# Altium PCB LO.PcbDoc
Units mm, origin at the board's own origin, x right, y up, seen from the top; angles counter-clockwise.
Board outline 35.98 x 47.66 mm, 4 copper layers (Top Layer, Internal Plane 1, Internal Plane 2, Bottom Layer), stack 0.758 mm thick; 148 components, 120 nets, 525 pads, 474 vias.
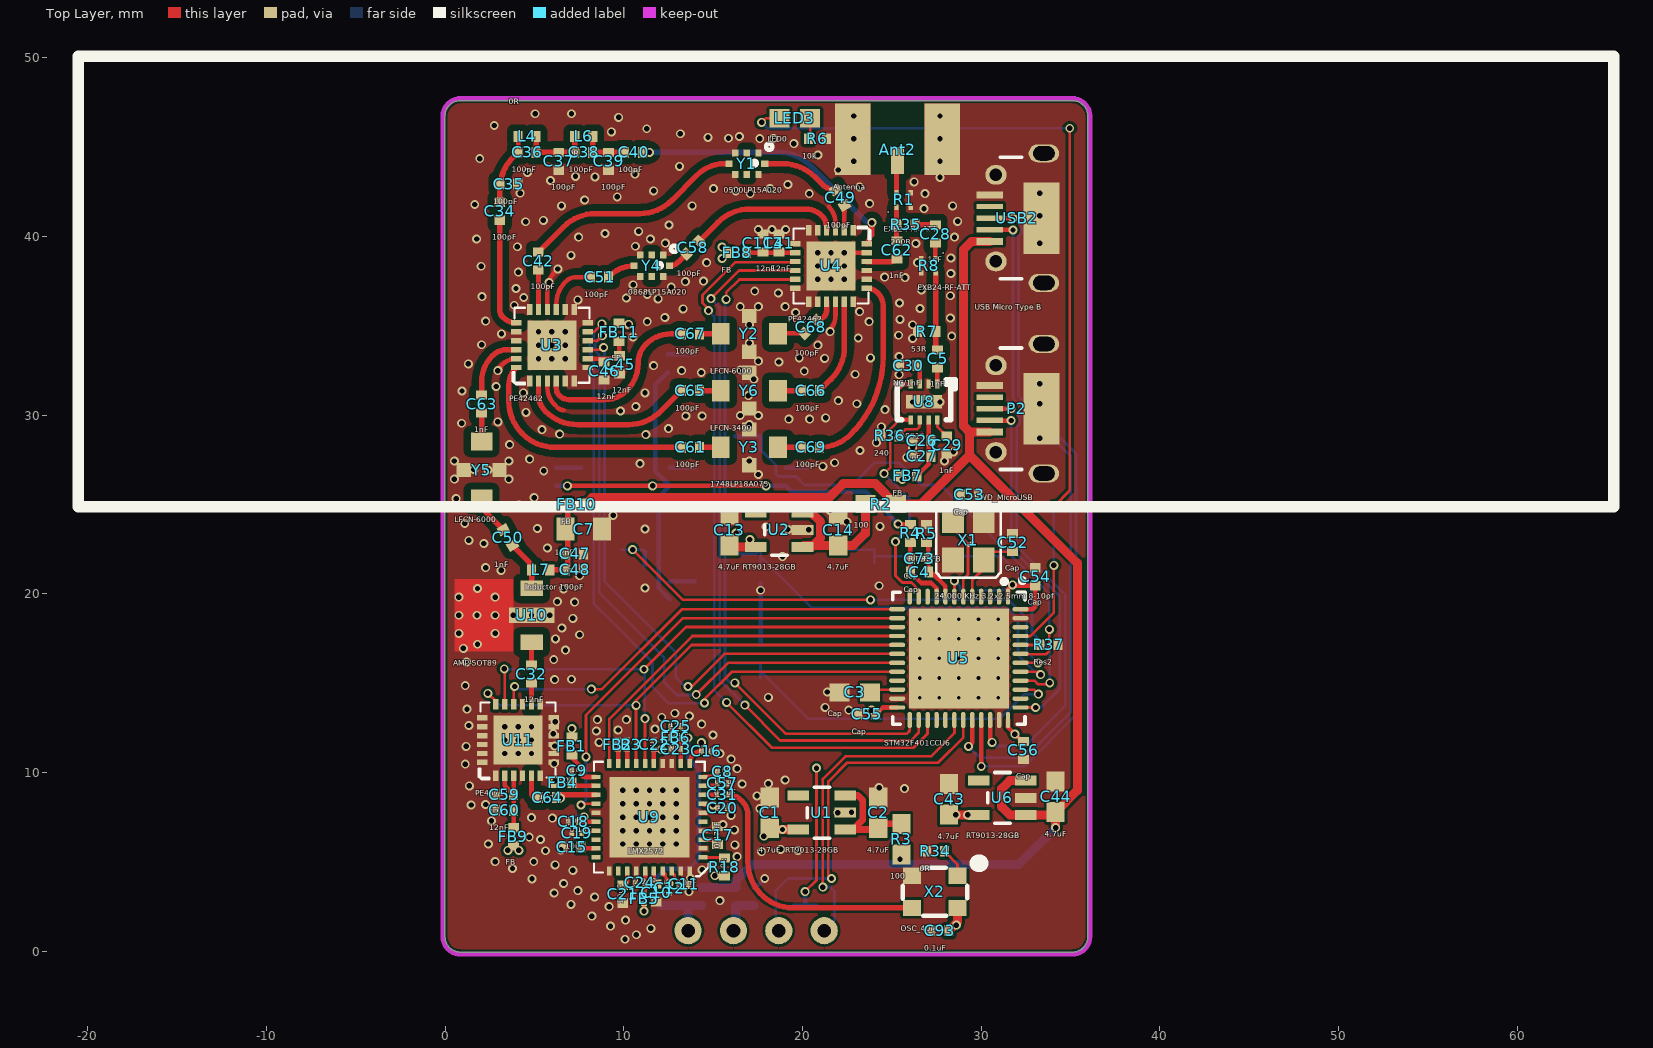
[diagram p0: Top Layer view]
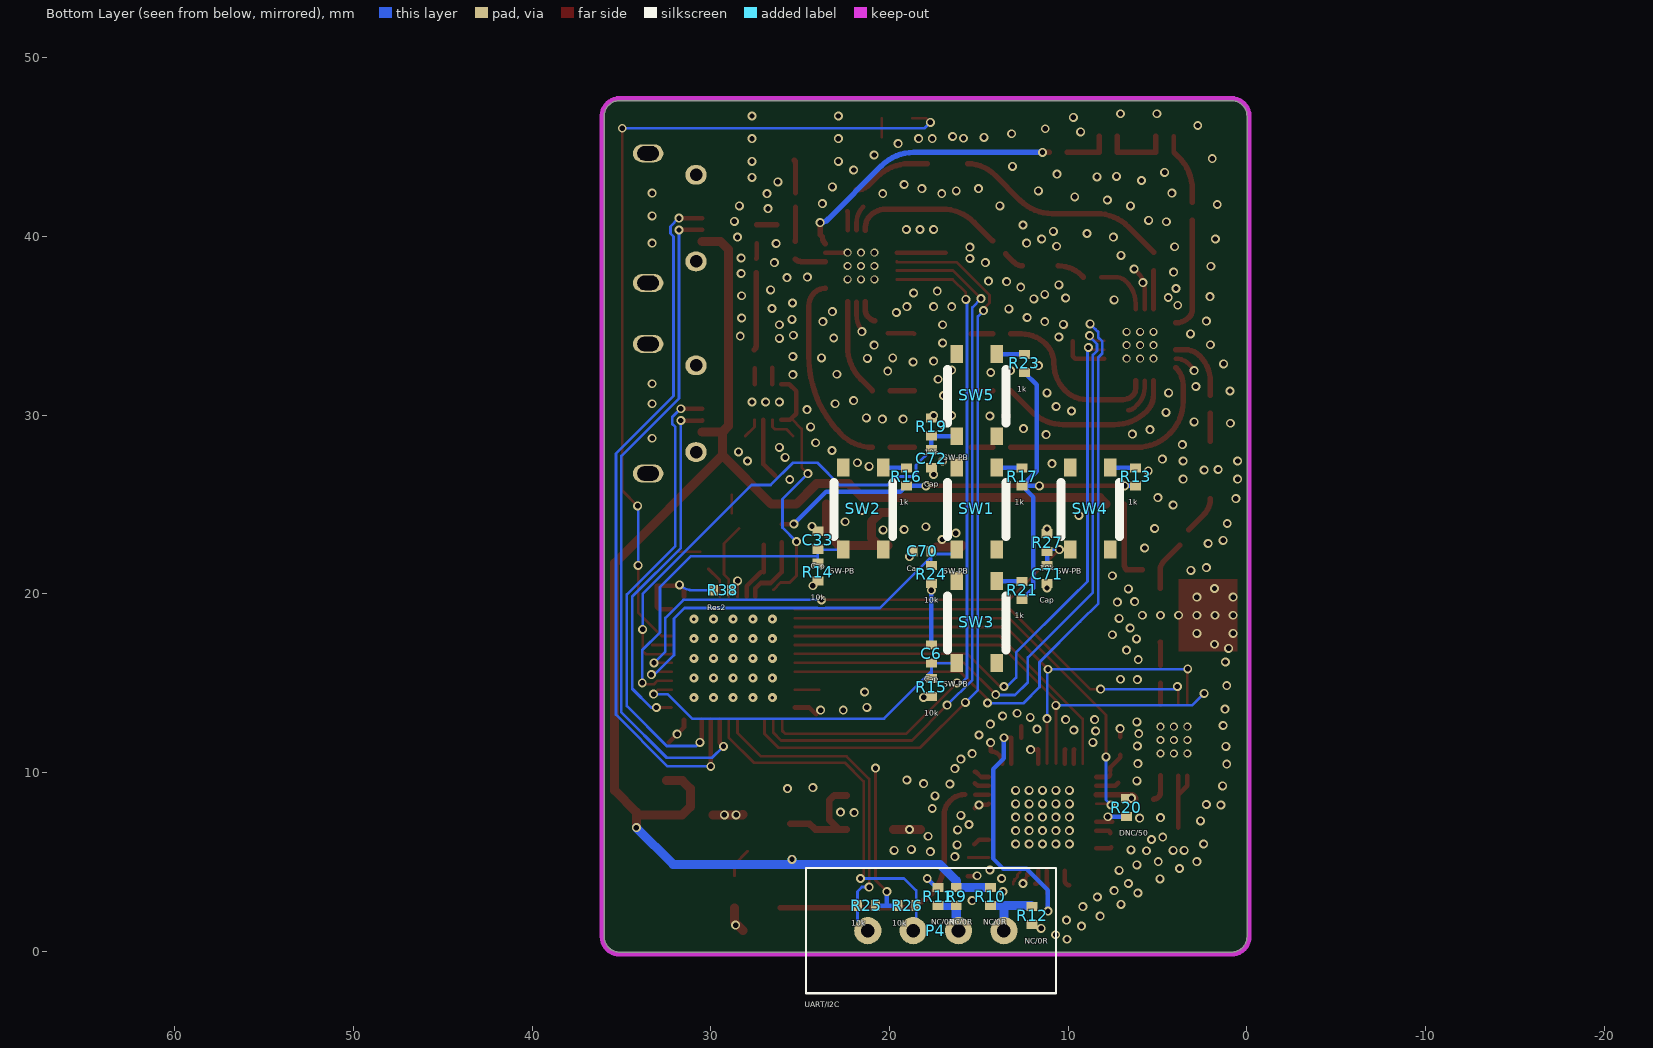
[diagram p1: Bottom Layer view, seen from below]
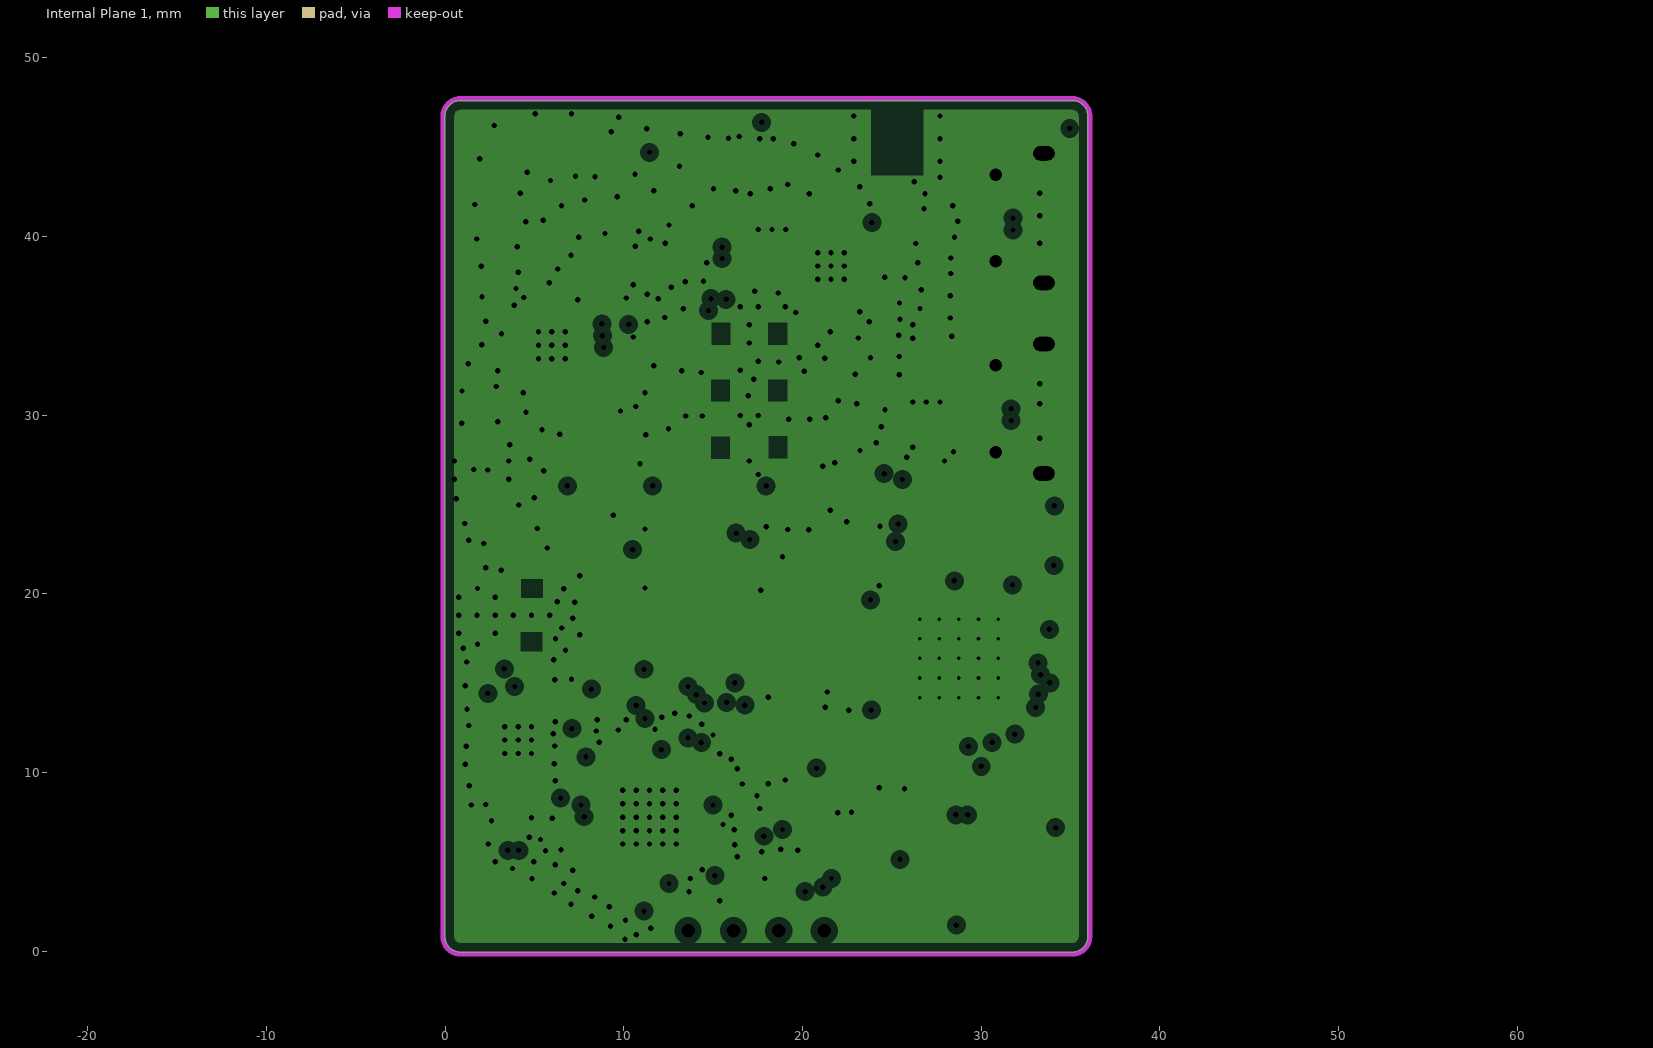
[diagram p2: Internal Plane 1, clearances drawn from the general rule]
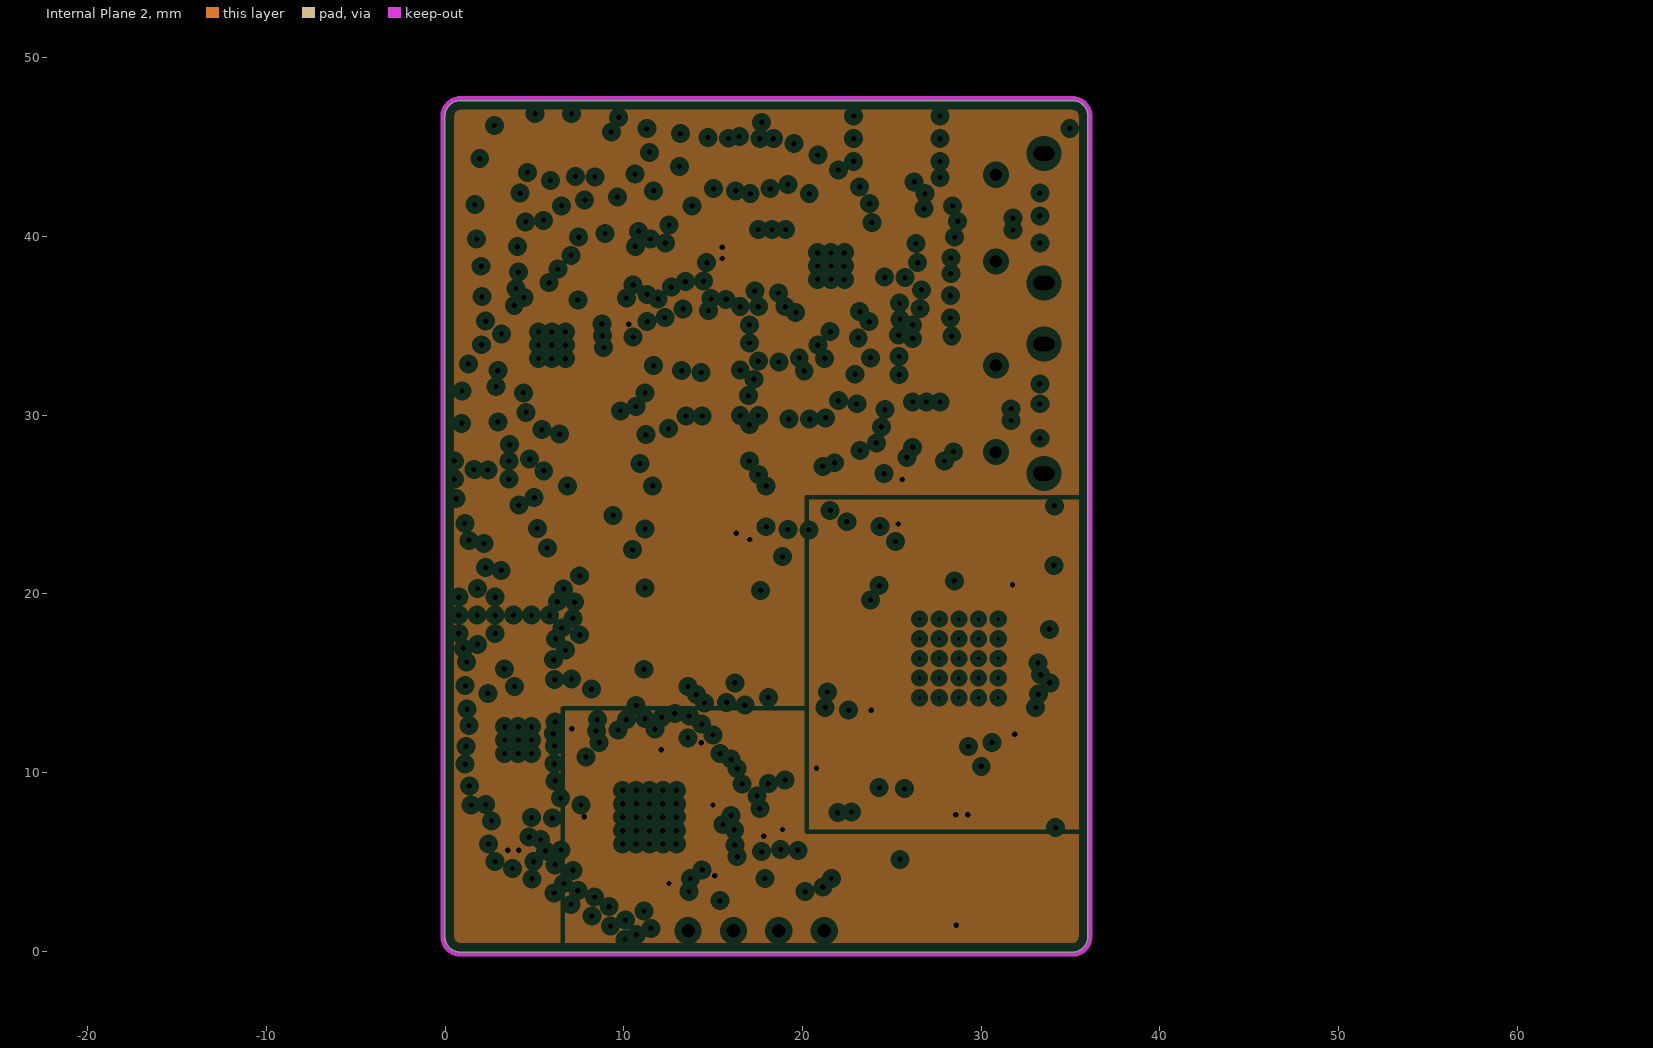
[diagram p3: Internal Plane 2, clearances drawn from the general rule]

## Layer stack, top to bottom
Top Solder: solder mask 0.0102, Solder Resist, Dk 3.8
Top Layer: signal copper 0.0356
Dielectric 1: prepreg 0.1803, Dk 4.6
Internal Plane 1: plane copper 0.036, net GND
Dielectric 3: core 0.254, Dk 4.6
Internal Plane 2: plane copper 0.036, net (Multiple Nets)
Dielectric 4: prepreg 0.1803, Dk 4.6
Bottom Layer: signal copper 0.0356
Bottom Solder: solder mask 0.0102, Solder Resist, Dk 3.8

## Board outline
-0.015,0.812 -0.015,46.729 cw(c0.857,46.729) 0.857,47.602 35.091,47.602 cw(c35.091,46.729) 35.963,46.729 35.963,0.812 cw(c35.091,0.812) 35.091,-0.061 0.857,-0.061 cw(c0.857,0.812)

## Design rules (kind name [scope] priority, off if disabled: settings)
Clearance 50R [InNetClass('50R') vs InPolygon] p1: gap=0.381 ignorepadtopadclearanceinfootprint=FALSE
Clearance [All] p2: gap=0.152 ignorepadtopadclearanceinfootprint=FALSE except(0: Arc-Hole Track-Hole SMDPad-Hole THPad-Hole Via-Hole Fill-Hole Poly-Hole Region-Hole Text-Hole)
DiffPairsRouting [All] p1: maxlimit=0.254 minlimit=0.254 mostfreqgap=0.254 toplayer_minwidth=0.152 toplayer_maxwidth=0.381 toplayer_prefwidth=0.381 bottomlayer_minwidth=0.152 bottomlayer_maxwidth=0.381 bottomlayer_prefwidth=0.381 maxuncoupledlength=12.7
MinimumSolderMaskSliver [All] p1 off: minsoldermaskwidth=0.254
PlaneClearance [All] p1: clearance=0.381
PlaneConnect [All] p1: planeconnectstyle=Direct reliefexpansion=0.508 reliefentries=4 reliefconductorwidth=0.254 reliefairgap=0.254
PolygonConnect [All] p1: connectstyle=Direct reliefconductorwidth=0.254 reliefentries=4 polygonreliefangle="90 Angle" airgapwidth=0.254
RoomDefinition filterbank_amp [InComponentClass('filterbank_amp')] p1 off: confinementstyle=ConfineIn formatcopy=TRUE lockcomponents=FALSE outline 37.075,1.486 231.004,1.486 231.004,7.582 37.075,7.582
RoomDefinition source [InComponentClass('source')] p2 off: confinementstyle=ConfineIn formatcopy=TRUE lockcomponents=FALSE outline 26.026,37.3 258.436,37.3 258.436,46.19 26.026,46.19
RoomDefinition power [InComponentClass('power')] p3 off: confinementstyle=ConfineIn formatcopy=TRUE lockcomponents=FALSE outline 26.153,29.045 78.35,29.045 78.35,36.03 26.153,36.03
RoomDefinition mcu [InComponentClass('mcu')] p4 off: confinementstyle=ConfineIn formatcopy=TRUE lockcomponents=FALSE outline 26.153,10.884 279.518,10.884 279.518,27.902 26.153,27.902
RoutingVias [All] p1: holewidth=0.305 width=0.508 viastyle="Through Hole" minholewidth=0.3 minwidth=0.5 maxholewidth=0.711 maxwidth=1.27
SilkToBoardRegionClearance [All] p1 off:
SilkToSilkClearance [All] p1 off: silktosilkclearance=0.254
SilkToSolderMaskClearance [IsPad] p1 off: minsilkscreentomaskgap=0.254 clearancetoexposedcopper=TRUE
SolderMaskExpansion [All] p1: expansion=0.102
Width [All] p1: maxlimit=1.524 minlimit=0.152 preferedwidth=0.152
23 further rules are at their usual default settings.

## Classes and differential pairs
component class filterbank_amp: Ant2 C5 C7 C26 C27 C28 C29 C30 C32 C34 C35 C36 C37 C38 C39 C40 C41 C42 C45 C46 C47 C48 C49 C50 C51 C58 C59 C60 C61 C62 C63 C64 C65 C66 C67 C68 C69 C113 FB7 FB8 FB9 FB10 FB11 L4 L6 L7 R1 R7 R8 R35 R36 U3 U4 U8 U10 U11 Y1 Y2 Y3 Y4 Y5 Y6
component class mcu: C3 C4 C6 C33 C52 C53 C54 C55 C56 C70 C71 C72 C73 LED3 P2 P4 R4 R5 R6 R9 R10 R11 R12 R13 R14 R15 R16 R17 R19 R21 R23 R24 R25 R26 R27 R37 R38 SW1 SW2 SW3 SW4 SW5 U5 USB2 X1
component class power: C1 C2 C13 C14 C43 C44 R2 R3 U1 U2 U6
component class source: C8 C9 C10 C11 C12 C15 C16 C17 C18 C19 C20 C21 C22 C23 C24 C25 C31 C57 C93 FB1 FB2 FB3 FB4 FB5 FB6 R18 R20 R34 U9 X2
net class 50R: 250M 500M 900M 1800M 3600M 6000M ATT dummy1 dummy2 dummy3 dummy4 NetAnt2_1 NetC5_1 NetC5_2 NetC28_1 NetC28_2 NetC32_1 NetC34_1 NetC34_2 NetC36_2 NetC38_2 NetC42_1 NetC42_2 NetC49_1 NetC50_1 NetC50_2 NetC51_1 NetC51_2 NetC58_1 NetC61_1 NetC61_2 NetC62_1 NetC62_2 NetC63_1 NetC63_2 NetC64_1 NetC64_2 NetC65_1 NetC65_2 NetC66_1 NetC67_1 NetC67_2 NetC68_1 NetC69_1

## Components (designator, comment, footprint, x,y, rotation, side; value= is the part's Value field where it differs from the comment)
Ant2 "Antenna" SMA-2 27.813,45.441 r180 top
C1 "4.7uF" 0603 18.161,7.747 r270 top
C2 "4.7uF" 0603 24.232,7.747 r270 top
C3 "Cap" 0603 22.911,14.478 r0 top value=4.7uF
C4 "Cap" 0402 26.543,21.209 r180 top value=0.1uF
C5 "1nF" 0402 27.559,33.147 r270 top
C6 "Cap" 0402 17.653,16.637 r270 bottom value=0.1uF
C7 "12nF" 0805 7.747,23.622 r180 top
C8 "1uF" 0201 15.494,10.033 r180 top
C9 "1uF" 0201 7.351,10.081 r180 top
C10 "10uF" 0402 11.811,3.251 r90 top
C11 "10nF" 0201 13.335,3.734 r180 top
C12 "1uF" 0201 12.522,3.505 r270 top
C13 "4.7uF" 0603 15.9,23.571 r270 top
C14 "4.7uF" 0603 21.996,23.571 r270 top
C15 "10uF" 0402 7.087,5.817 r0 top
C16 "1uF" 0201 14.605,11.176 r0 top
C17 "0.47uF" 0402 15.24,6.477 r270 top
C18 "1uF" 0201 7.163,7.239 r180 top
C19 "0.1uF" 0201 7.366,6.604 r0 top
C20 "1uF" 0201 15.494,8.001 r0 top
C21 "10uF" 0402 9.931,3.175 r90 top
C22 "1uF" 0201 11.684,11.557 r90 top
C23 "NC" 0201 12.903,11.303 r180 top
C24 "2.2nF" 0201 10.897,3.81 r180 top
C25 "15nF" 0201 12.903,12.573 r0 top
C26 "1nF" 0402 26.67,28.575 r0 top
C27 "1nF" 0402 26.67,27.686 r0 top
C28 "1nF" 0402 27.432,40.132 r270 top
C29 "1nF" 0402 28.067,28.321 r270 top
C30 "NC/1nF" 0402 25.908,32.766 r0 top
C31 "0.1uF" 0201 15.494,8.763 r180 top
C32 "12nF" 0402 4.826,15.494 r90 top
C33 "Cap" 0402 24.003,22.987 r90 bottom value=0.1uF
C34 "100pF" 0402 3.048,41.402 r90 top
C35 "100pF" 0402 3.556,42.926 r180 top
C36 "100pF" 0402 4.572,44.704 r0 top
C37 "100pF" 0402 6.35,44.196 r90 top
C38 "100pF" 0402 7.747,44.704 r0 top
C39 "100pF" 0402 9.144,44.196 r90 top
C40 "100pF" 0402 10.541,44.704 r0 top
C41 "12nF" 0402 18.669,39.624 r270 top
C42 "100pF" 0402 5.207,38.608 r90 top
C43 "4.7uF" 0603 28.194,8.509 r270 top
C44 "4.7uF" 0603 34.163,8.636 r270 top
C45 "12nF" 0402 9.754,32.817 r270 top
C46 "12nF" 0402 8.89,32.461 r270 top
C47 "1nF" 0402 7.239,22.225 r180 top
C48 "100pF" 0402 7.239,21.336 r180 top
C49 "100pF" 0402 22.098,42.164 r300 top
C50 "1nF" 0402 3.505,23.139 r120 top
C51 "100pF" 0402 8.636,37.719 r0 top
C52 "Cap" 0402 31.75,22.86 r270 top value=20pF
C53 "Cap" 0402 29.337,25.527 r180 top value=20pF
C54 "Cap" 0402 33.02,20.955 r270 top value=0.1uF
C55 "Cap" 0402 23.597,13.259 r0 top value=0.1uF
C56 "Cap" 0402 32.36,11.227 r90 top value=0.1uF
C57 "0.1uF" 0201 15.494,9.398 r180 top
C58 "100pF" 0402 13.843,39.37 r45 top
C59 "12nF" 0402 3.302,8.763 r0 top
C60 "12nF" 0402 3.302,7.874 r0 top
C61 "100pF" 0402 13.716,28.194 r0 top
C62 "1nF" 0402 25.273,39.231 r90 top
C63 "1nF" 0402 2.032,30.607 r90 top
C64 "12nF" 0402 5.715,8.585 r180 top
C65 "100pF" 0402 13.716,31.369 r0 top
C66 "100pF" 0402 20.447,31.369 r0 top
C67 "100pF" 0402 13.716,34.544 r0 top
C68 "100pF" 0402 20.447,34.925 r45 top
C69 "100pF" 0402 20.447,28.194 r0 top
C70 "Cap" 0402 18.161,22.377 r0 bottom value=0.1uF
C71 "Cap" 0402 11.176,21.082 r270 bottom value=0.1uF
C72 "Cap" 0402 17.653,27.559 r270 bottom value=0.1uF
C73 "Cap" 0402 26.543,21.971 r180 top value=0.1uF
C93 "0.1uF" 0402 27.686,1.143 r180 top
C113 "12nF" 0402 17.78,39.624 r270 top
FB1 "FB" 0402 7.087,11.481 r270 top
FB2 "50" 0201 9.652,11.557 r270 top
FB3 "50" 0201 10.16,11.557 r270 top
FB4 "50" 0402 6.579,9.423 r0 top
FB5 "0R" 0201 11.125,2.921 r270 top
FB6 "330" 0201 12.903,11.938 r0 top
FB7 "FB" 0402 25.883,26.594 r0 top
FB8 "FB" 0402 16.358,39.091 r180 top
FB9 "FB" 0402 3.81,6.401 r270 top
FB10 "FB" 0402 7.366,25.019 r180 top
FB11 "FB" 0402 9.728,34.63 r90 top
L4 "0R" 0402 4.572,45.593 r0 top
L6 "0R" 0402 7.747,45.593 r0 top
L7 "Inductor" 0402 5.346,21.336 r180 top value=10nH
LED3 "LED0" 0603 19.558,46.609 r0 top
P2 "SWD_MicroUSB" MICRO-YZX 36.322,30.353 r90 top
P4 "UART/I2C" 4pSocket 18.669,1.143 r180 bottom
R1 "EXB24-RF-ATT" EXB24AT-RF-ATT 25.654,42.037 r90 top
R2 "100" 0603 24.359,25.019 r0 top value=0Ohm
R3 "100" 0603 25.527,6.274 r270 top value=0Ohm
R4 "0R/FB" 0402 26.035,23.368 r90 top
R5 "0R/FB" 0402 26.924,23.368 r270 top
R6 "10k" 0402 20.828,45.466 r0 top value=0Ohm
R7 "53R" 0402 26.949,34.671 r180 top
R8 "EXB24-RF-ATT" EXB24AT-RF-ATT 27.051,38.354 r270 top
R9 "NC/0R" 0402 16.256,3.048 r90 bottom value=0Ohm
R10 "NC/0R" 0402 14.351,3.048 r90 bottom value=0Ohm
R11 "NC/0R" 0402 17.272,3.048 r270 bottom value=0Ohm
R12 "NC/0R" 0402 12.014,1.981 r90 bottom value=0Ohm
R13 "1k" 0402 6.223,26.543 r270 bottom value=0Ohm
R14 "10k" 0402 24.003,21.209 r90 bottom value=0Ohm
R15 "10k" 0402 17.653,14.757 r90 bottom value=0Ohm
R16 "1k" 0402 19.05,26.543 r270 bottom value=0Ohm
R17 "1k" 0402 12.573,26.543 r270 bottom value=0Ohm
R18 "10k" 0402 15.621,4.699 r90 top
R19 "10k" 0402 17.653,29.337 r270 bottom value=0Ohm
R20 "DNC/50" 0402 6.731,8.026 r90 bottom
R21 "1k" 0402 12.573,20.193 r270 bottom value=0Ohm
R23 "1k" 0402 12.446,32.893 r270 bottom value=0Ohm
R24 "10k" 0402 17.653,21.082 r90 bottom value=0Ohm
R25 "10k" 0402 21.285,2.54 r180 bottom value=0Ohm
R26 "10k" 0402 18.999,2.54 r0 bottom value=0Ohm
R27 "10k" 0402 11.176,22.86 r270 bottom value=0Ohm
R34 "0R" 0402 27.432,5.588 r180 top value=0Ohm
R35 "200R" 0402 25.781,40.64 r0 top
R36 "240" 0402 24.892,28.829 r180 top
R37 "Res2" 0402 33.782,17.145 r0 top value=10k
R38 "Res2" 0402 29.337,20.193 r180 bottom value=10k
SW1 "SW-PB" SW3x4 15.113,24.765 r90 bottom
SW2 "SW-PB" SW3x4 21.463,24.765 r90 bottom
SW3 "SW-PB" SW3x4 15.113,18.415 r90 bottom
SW4 "SW-PB" SW3x4 8.763,24.765 r90 bottom
SW5 "SW-PB" SW3x4 15.113,31.115 r90 bottom
U1 "RT9013-28GB" SOT23-5 21.082,7.747 r90 top
U2 "RT9013-28GB" SOT23-5 18.694,23.571 r90 top
U3 "PE42462" PE42462 5.969,33.909 r90 top
U4 "PE42462" PE42462 21.59,38.342 r270 top
U5 "STM32F401CCU6" STM-UFQFPN48_N 28.745,16.383 r270 top
U6 "RT9013-28GB" SOT23-5 31.183,8.572 r90 top
U8 "AD8319" AD8319 26.797,30.734 r180 top
U9 "LMX2572" LMX2572 11.43,7.493 r180 top
U10 "AMP-SOT89" SOT-89 4.838,18.796 r90 top
U11 "PE43711" PE43711 4.076,11.811 r90 top
USB2 "USB Micro Type B" MICRO-YZX 36.322,41.021 r90 top
X1 "24.000 KHz 3.2x2.5mm 8-10pf" OSCILLATOR-3.2X2.5 29.286,22.987 r90 top
X2 "OSC_40M" TXC_7Q 27.389,3.316 r180 top
Y1 "0500LP15A020" 5515LP15A730/0868LP15A020 16.879,44.069 r180 top
Y2 "LFCN-6000" 1748LP18A075 17.018,34.544 r0 top
Y3 "1748LP18A075" 1748LP18A075 17.018,28.194 r0 top
Y4 "0868LP15A020" 5515LP15A730/0868LP15A020 11.557,38.354 r180 top
Y5 "LFCN-6000" 1748LP18A075 2.032,26.924 r90 top
Y6 "LFCN-3400" 1748LP18A075 17.018,31.369 r0 top

## Footprints (in the part's own frame and the unit in brackets; to place one, negate y for a bottom-side part, rotate by r counter-clockwise, add the part's x,y. Pads: shape width x height; smd on the part's side, far side on the other; paste and mask are expansions set on the pad)
4pSocket [mil]
  round 60 hole 30: 1(-100,0) 2(0,0) 3(100,0) 4(200,0)
  silkscreen extent -236,-138 315,138
0201 [mm]
  rect 0.25x0.35 smd: 1(-0.275,0) 2(0.275,0)
0402 [mil] "0402-RES"
  rect 20x24 smd: 1(-19.68,0) 2(20,0)
0603 [mil] "0603-RES"
  rect 44x40 smd: 1(-33.46,0) 2(34,0)
0805 [mm]
  rect 1x1.27 smd: 1(-1.016,0) 2(1.016,0)
  body extent -1.27,-0.76 1.27,0.76, height 0.8
1748LP18A075 [mm]
  rect 1x1.2 smd: 1(-1.6,0) 2(1.6,0)
  rect 0.8x0.8 smd: 3(0,-1) 4(0,1)
  body extent -1.6,-0.8 1.6,0.8, height 1
5515LP15A730/0868LP15A020 [mm]
  rect 0.35x0.4 smd: 1(-0.65,-0.6) 2(0,-0.6) 3(0.65,-0.6) 5(0.65,0.6) 6(0,0.6) 7(-0.65,0.6)
  rect 0.4x0.35 smd: 4(1,0) 8(-1,0)
  silkscreen extent -1.43,-1.12 -0.3,0.1, body extent -1,-0.6 1,0.6, height 0.85
AD8319 [mm]
  rect 2x0.75 smd: 0(0,0)
  rect 0.25x0.5 smd: 1(-0.75,-1) 2(-0.25,-1) 3(0.25,-1) 4(0.75,-1) 5(0.75,1) 6(0.25,1) 7(-0.25,1) 8(-0.75,1)
  silkscreen extent -1.75,-1.25 1.5,1, body extent -1.5,-1 1.5,1, height 0.75
EXB24AT-RF-ATT [mm]
  rect 0.3x0.25 smd: 1(-0.4,-0.4) 2(0.4,-0.4) 3(0.4,0.4) 4(-0.4,0.4)
  body extent -0.5,-0.5 0.5,0.5, height 0.35
LMX2572 [mm]
  rect 4.5x4.5 smd: 0(0,0)
  rect 0.5x0.25 smd: 1(-3,2.25) 2(-3,1.75) 3(-3,1.25) 4(-3,0.75) 5(-3,0.25) 6(-3,-0.25) 7(-3,-0.75) 8(-3,-1.25) 9(-3,-1.75) 10(-3,-2.25) 21(3,-2.25) 22(3,-1.75) 23(3,-1.25) 24(3,-0.75) 25(3,-0.25) 26(3,0.25) 27(3,0.75) 28(3,1.25) 29(3,1.75) 30(3,2.25)
  rect 0.25x0.5 smd: 11(-2.25,-3) 12(-1.75,-3) 13(-1.25,-3) 14(-0.75,-3) 15(-0.25,-3) 16(0.25,-3) 17(0.75,-3) 18(1.25,-3) 19(1.75,-3) 20(2.25,-3) 31(2.25,3) 32(1.75,3) 33(1.25,3) 34(0.75,3) 35(0.25,3) 36(-0.25,3) 37(-0.75,3) 38(-1.25,3) 39(-1.75,3) 40(-2.25,3)
  silkscreen extent -3.3,-3.1 3.1,3.3, body extent -3,-3 3,3, height 1
MICRO-YZX [mm]
  rect 0.4x1.5 smd: 1(-1.3,5.85) 5(1.3,5.85)
  rect 0.3x1.5 smd: 2(-0.65,5.85) 3(0,5.85) 4(0.65,5.85)
  oval 1x1.7 hole 0.8 slot 1.2 at 90 deg: 5(-3.625,2.82) 5(3.625,2.82)
  oval 1.1x1.2 hole 0.7: 5(-2.425,5.5) 5(2.425,5.5)
  rect 4x2 smd: 5(0,2.95)
  silkscreen extent -3.4,4.05 3.4,5.25, body extent -4.02,0.33 3.98,5.93, height 2.6
OSCILLATOR-3.2X2.5 [mil] "OSCILLATOR-3.2X2.5"
  rect 56x48 smd: 1(-43.31,-33.46) 2(44,-33.46) 3(44,34) 4(-43.31,34)
  silkscreen extent -95,-83 83,71
PE42462 [mm]
  rect 2.75x2.75 smd: 0(0,0)
  rect 0.6x0.3 smd: 1(-2,1.25) 2(-2,0.75) 3(-2,0.25) 4(-2,-0.25) 5(-2,-0.75) 6(-2,-1.25) 13(2,-1.25) 14(2,-0.75) 15(2,-0.25) 16(2,0.25) 17(2,0.75) 18(2,1.25)
  rect 0.3x0.6 smd: 7(-1.25,-2) 8(-0.75,-2) 9(-0.25,-2) 10(0.25,-2) 11(0.75,-2) 12(1.25,-2) 19(1.25,2) 20(0.75,2) 21(0.25,2) 22(-0.25,2) 23(-0.75,2) 24(-1.25,2)
  silkscreen extent -2.2,-2.1 2.1,2.2, body extent -2,-2 2,2, height 0.85
PE43711 [mm]
  rect 2.75x2.75 smd: 0(0,0)
  rect 0.6x0.3 smd: 1(-2,1.25) 2(-2,0.75) 3(-2,0.25) 4(-2,-0.25) 5(-2,-0.75) 6(-2,-1.25) 13(2,-1.25) 14(2,-0.75) 15(2,-0.25) 16(2,0.25) 17(2,0.75) 18(2,1.25)
  rect 0.3x0.6 smd: 7(-1.25,-2) 8(-0.75,-2) 9(-0.25,-2) 10(0.25,-2) 11(0.75,-2) 12(1.25,-2) 19(1.25,2) 20(0.75,2) 21(0.25,2) 22(-0.25,2) 23(-0.75,2) 24(-1.25,2)
  silkscreen extent -2.2,-2.1 2.1,2.2, body extent -2,-2 2,2, height 0.85
SMA-2 [mm]
  rect 0.75x1.5 smd: 1(2.5,1.2)
  rect 2x4 smd: GND(0,0) GND(5,0)
  Top Layer pour cut-out: 1,2 4,2 4,-2 1,-2
SOT23-5 [mil] "SOT23-5"
  rect 22x48 smd: 1(-37.4,-51.19) 2(0,-51.19) 3(38,-51.19) 4(38,52) 5(-37.4,52)
  silkscreen extent -56,-17 56,32
SOT-89 [mil]
  rect 34x50 smd: 1(-59.06,0) 3(59.06,0)
  rect 34x100 smd: 2(0,0)
  Top Layer region: -79.99,40 80.01,40 80.01,170 -79.99,170
STM-UFQFPN48_N [mm] "QFN, 48-Leads, Body 7.1x7.1mm, Pitch 0.5mm, Thermal Pad 5.6x5.6mm, IPC Medium Density"
  oval 0.9x0.25 smd: 1(-3.45,2.75) 2(-3.45,2.25) 3(-3.45,1.75) 4(-3.45,1.25) 5(-3.45,0.75) 6(-3.45,0.25) 7(-3.45,-0.25) 8(-3.45,-0.75) 9(-3.45,-1.25) 10(-3.45,-1.75) 11(-3.45,-2.25) 12(-3.45,-2.75) 25(3.45,-2.75) 26(3.45,-2.25) 27(3.45,-1.75) 28(3.45,-1.25) 29(3.45,-0.75) 30(3.45,-0.25) 31(3.45,0.25) 32(3.45,0.75) 33(3.45,1.25) 34(3.45,1.75) 35(3.45,2.25) 36(3.45,2.75)
  oval 0.25x0.9 smd: 13(-2.75,-3.45) 14(-2.25,-3.45) 15(-1.75,-3.45) 16(-1.25,-3.45) 17(-0.75,-3.45) 18(-0.25,-3.45) 19(0.25,-3.45) 20(0.75,-3.45) 21(1.25,-3.45) 22(1.75,-3.45) 23(2.25,-3.45) 24(2.75,-3.45) 37(2.75,3.45) 38(2.25,3.45) 39(1.75,3.45) 40(1.25,3.45) 41(0.75,3.45) 42(0.25,3.45) 43(-0.25,3.45) 44(-0.75,3.45) 45(-1.25,3.45) 46(-1.75,3.45) 47(-2.25,3.45) 48(-2.75,3.45)
  rect 5.6x5.6 smd: 49(0,0)
  silkscreen extent -4.47,-3.7 3.7,3.7, body extent -3.55,-3.55 3.55,3.55, height 0.6
SW3x4 [mm]
  rect 1x0.7 smd: 1(-2.3,1.125) 2(2.3,-1.125) 3(2.3,1.125) 4(-2.3,-1.125)
  silkscreen extent -1.58,-1.65 1.45,1.63, body extent -2,-1.5 2,1.5, height 2.6
TXC_7Q [mm]
  rect 1x0.9 smd: 1(-1.275,-0.9) 2(1.275,-0.9) 3(1.275,0.9) 4(-1.275,0.9)
  silkscreen extent -2.52,-1.6 1.78,1.35

## Part data
C1 C2 C5 C13 C14 C26 C27 C28 C29 C30 C43 C44: library part Cap, "Capacitor", LatestRevisionDate=17-Jul-2002, LatestRevisionNote="Re-released for DXP Platform.", PackageDescription="Radial Cap, Thru-Hole; 2 Leads; 0.3 in Pin Spacing", PackageReference=RAD-0.3, Published=8-Jun-2000, Publisher="Altium Limited"
C3 C4 C6 C33 C52 C53 C54 C55 C56 C70 C71 C72 C73: "Capacitor", LatestRevisionDate=17-Jul-2002, LatestRevisionNote="Re-released for DXP Platform.", PackageDescription="Radial Cap, Thru-Hole; 2 Leads; 0.3 in Pin Spacing", PackageReference=RAD-0.3, Published=8-Jun-2000, Publisher="Altium Limited"
C7 C8 C9 C10 C11 C12 C15 C16 C17 C18 C19 C20 C21 C22 C23 C24 C25 C31 C32 C34 C35 C36 C37 C38 C39 C40 C41 C42 C45 C46 C47 C48 C49 C50 C51 C57 C58 C59 C60 C61 C62 C63 C64 C65 C66 C67 C68 C69 C93 C113: library part CAP0402-CAP, "<b>Capacitor</b> / Standard 0603 ceramic capacitor, and 0.1\" leaded capacitor.", PARTNO=CC0402ZRY5V7BB104
FB1 FB2 FB3 FB4 FB5 FB6 FB7 FB8 FB9 FB10 FB11 R2 R3 R4 R5 R6 R7 R9 R10 R11 R12 R13 R14 R15 R16 R17 R18 R19 R20 R21 R23 R24 R25 R26 R27 R34 R35 R36: library part Res2, "Resistor", LatestRevisionDate=17-Jul-2002, LatestRevisionNote="Re-released for DXP Platform.", PackageDescription="Axial Device, Thru-Hole; 2 Leads; 0.4 in Pin Spacing", PackageReference=AXIAL-0.4, Published=8-Jun-2000, Publisher="Altium Limited"
L4 L6: library part L/2.5*2.0
LED3: "Typical INFRARED GaAs LED", LatestRevisionDate=08-Jul-2005, LatestRevisionNote="Mech Layer 1 removed.", PackageDescription="LED; 2 Leads", PackageReference=LED-0, Published=8-Jun-2000, Publisher="Altium Limited"
P2: "Connector SMD USB Micro Type B middle mount", Manufacturer 1="Molex Inc", Package / Case=SMD, Supplier Part Number 1=WM17142CT-ND, SCDType=undef, Supplier 1=Digi-Key
P4: library part 4PSocket
R37 R38: "Resistor", LatestRevisionDate=17-Jul-2002, LatestRevisionNote="Re-released for DXP Platform.", PackageDescription="Axial Device, Thru-Hole; 2 Leads; 0.4 in Pin Spacing", PackageReference=AXIAL-0.4, Published=8-Jun-2000, Publisher="Altium Limited"
SW1 SW2 SW3 SW4 SW5: "Switch", LatestRevisionDate=17-Jul-2002, LatestRevisionNote="Re-released for DXP Platform.", PackageDescription="Switch; 2 Leads", PackageReference=SPST-2, Published=24-Mar-1999, Publisher="Altium Limited"
U1 U2 U6: library part LP5907
U5: "ARM Cortex-M4 32-bit MCU+FPU, 105 DMIPS, 256 kB Flash, 64 kB Internal RAM, 36 I/Os, 48-pin UFQFPN, -40 to 85 degC, Tray", I/Os (High Current)=36, Manufacturer=STMicroelectronics, Operating Frequency(F) (Processor speed) (MHz)=84, Supplier Part Number 1=19X6217, Supply Voltage(Vcc) max (V)=3.6, Supply Voltage(Vcc) min (V)=1.8, ComponentLink1Description="Manufacturer URL", ComponentLink1URL=http://www.st.com/web/en/home.html, ComponentLink2Description=Datasheet, ComponentLink2URL=http://www.st.com/st-web-ui/static/active/en/resource/technical/document/data_brief/DM00071938.pdf, ComponentLink3Description="Package Specification", ComponentLink3URL=http://www.st.com/st-web-ui/static/active/en/resource/technical/document/data_brief/DM00071938.pdf, Core="ARM Cortex-M4", DatasheetVersion="Rev. 1", FLASH Size (Prog) (kB)=256, Internal RAM Size (kB)=64, Mounting Technology="Surface Mount", PackageDescription="48-Pin Ultra Thin Fine Pitch Quad Flat No-Lead, 7 x 7 x 0.6 mm Body, 0.5 mm Pitch, Exposed Pad", PackageReference=UFQFPN48, PackageVersion="Rev. 1, 04/2013", Packing=Tray, PartNumber=STM32F401CCU6, Supplier 1=Newark, Supplier 2=Mouser, Supplier Part Number 2=511-STM32F401CCU6
USB2: library part USB_Micro_TypeB, "Connector SMD USB Micro Type B middle mount", Manufacturer 1="Molex Inc", Manufacturer Part Number 1=47491-0001, Package / Case=SMD, Supplier Part Number 1=WM17142CT-ND, SCDType=undef, Supplier 1=Digi-Key
X1: library part OSCILLATOR-3.2X2.5, "Crystal Oscillator in 3.2x2.5 SMD"
Y1 Y4: library part 5515LP15A730/0868LP15A020
Y2 Y5 Y6: library part 1748LP18A075
L7: Code_IEC=1005, Code_JEITA=0402, LatestRevisionDate=29-May-2009, LatestRevisionNote="IPC-7351 Footprint Added.", PackageDescription="Chip Inductor", PackageReference=0402-A, Published=8-Jun-2000, Publisher="Altium Limited"

## Via types
v1: diameter 0.5, hole 0.3, Top Layer to Bottom Layer, 422 vias
v2: diameter 0.45, hole 0.3, Top Layer to Bottom Layer, 27 vias
v3: diameter 0.5, hole 0.2, Top Layer to Bottom Layer, 25 vias

## Nets (pads, with @x,y where several pads share a name; then routed paths per layer and width w, separated by ;. In a path a pad name is that pad's centre, name@x,y a point inside that pad or via, vN(x,y) a via of type N, cw(c..) or ccw(c..) an arc to the next point about the centre after c; other vN are vias at no path point)
3.3D: C43.2 C54.2 C55.2 C56.2 R4.2 R13.2 R16.2 R17.2 R21.2 R23.2 R25.2 R26.2 R38.1 U5.1 U5.24 U5.36 U5.48 U6.5 | length 55.4
  Top Layer w0.152: v1(20.142,3.327) 20.777,3.962 v1(20.777,10.236)
  Top Layer w0.254: v1(6.833,26.035) v1(11.608,26.035) v1(17.958,26.035) ; C55.2 24.479,13.633 U5.24 ; v1@25.375,23.876 R4.2 ; U5.36 31.495,12.523 C56.2@32.334,11.684 ; U5.1 31.495,20.243 31.699,20.447 C54.2 33.02,19.279 32.874,19.133 U5.48
  Top Layer w0.508: C43.2 ccw(c28.25,7.701) 28.25,7.622 U6.5
  Bottom Layer w0.152: R38.1 31.014,20.193 ccw(c31.014,21.234) v1(31.75,20.498)
  Bottom Layer w0.254: R13.2 v1(6.833,26.035) ; v1(11.608,26.035) R17.2 ; R23.2 11.76,31.699 11.76,26.848 R17.2 ; R21.2 11.938,20.32 11.938,25.4 R17.2 ; v1(17.958,26.035) R16.2 19.38,25.705 23.546,25.705 v1(25.349,23.901) ; R26.2 20.142,2.54 ; v1(20.142,3.327) 20.142,2.54 ; R25.2 20.142,2.54
  other v1: 28.575,7.622 29.235,7.622 31.877,12.141 23.851,13.487
5V: C44.2 FB10.1 P2.1 R2.2 R3.2 R9.2 R10.2 U6.1 U6.3 USB2.1 | length 89.2
  Top Layer w0.508: FB10.1 8.222,25.375 15.212,25.375 15.224,25.386 16.577,25.386 16.585,25.379 21.308,25.379 21.316,25.386 21.5,25.386 22.276,26.162 24.079,26.162 R2.2 26.603,25.019 29.342,27.758 ; P2.1 29.342,29.053 ; USB2.1 29.459,39.721 29.007,39.268 29.007,29.388 29.342,29.053 ; U6.3 31.585,9.537 31.14,9.093 31.14,8.077 31.595,7.622 U6.1 C44.2@34.013,7.622 ; v1(34.163,6.909) C44.2 35.382,8.992 35.382,21.717 29.342,27.758 ; 29.342,27.758 29.342,29.053
  Bottom Layer w0.508: R10.2 R9.2 16.256,3.937 17.17,4.851 25.451,4.851 ; v1(25.451,5.131) 25.451,4.851 ; v1(34.163,6.909) 32.106,4.851 25.451,4.851
250M: C40.2 U4.24 | length 15.6
  Top Layer w0.305: C40.2 v1(11.43,44.704) ; U4.24 ccw(c23.206,39.976) 23.749,39.976 23.876,40.103 v1(23.876,40.767)
  Bottom Layer w0.305: v1(11.43,44.704) 18.633,44.704 cw(c18.633,42.164) 20.429,43.96 23.442,40.947 ccw(c23.876,41.38) v1(23.876,40.767)
500M: C49.2 U4.2 | length 1.1
  Top Layer w0.254: U4.2 22.34,41.373 cw(c22.381,41.373) 22.352,41.402
900M: C58.2 U4.4 | length 8.5
  Top Layer w0.305: C58.2@14.224,39.751 15.258,40.785 cw(c17.054,38.989) 17.054,41.529 20.162,41.529 cw(c20.162,40.228) 21.082,41.148 cw(c20.459,40.525) 21.34,40.525 U4.4
1800M: C69.2 U4.19 | length 11.1
  Top Layer w0.305: C69.2 ccw(c20.955,30.647) 22.689,28.912 ccw(c18.292,33.31) 24.511,33.31 24.511,36.098 ccw(c23.466,36.098) 24.205,36.837 ccw(c23.59,36.222) U4.19
3600M: C66.2 U4.17 | length 5.4
  Top Layer w0.305: C66.2 21.596,32.01 ccw(c19.8,33.806) 22.34,33.806 U4.17
6000M: C68.2 U4.15 | length 1.3
  Top Layer w0.305: C68.2 ccw(c20.806,35.694) 21.096,35.404 21.218,35.527 ccw(c20.925,35.82) 21.34,35.82 U4.15
AGND: C4.1 C73.1 R5.2 U5.8 | length 3.2
  Top Layer w0.254: C4.1 C73.1 R5.2@27.043,22.741 ; C4.1@27.203,21.209 27.995,20.417 U5.8
ATT: C32.2 U10.1 | length 1.3
  Top Layer w0.305: C32.2 4.826,17.267 cw(c4.867,17.267) U10.1
CLOCK40M: C31.1 X2.3 | length 15.1
  Top Layer w0.305: C31.1 cw(c15.769,7.59) 16.942,7.59 16.942,4.956 ccw(c19.482,4.956) 19.482,2.416 X2.3
dummy1: Y4.6
dummy2: Y1.6
dummy3: Y1.2
dummy4: Y4.2
GND: Ant2.GND C1.1 C2.1 C3.1 C6.1 C7.1 C8.1 C9.2 C10.1 C11.1 C12.2 C13.1 C14.1 C15.1 C16.2 C17.1 C18.2 C19.1 C20.2 C21.1 C22.2 C23.2 C24.2 C25.2 C26.1 C27.1 C29.2 C30.1 C33.2 C35.1 C37.1 C39.1 C41.1 C43.1 C44.1 C45.2 C46.2 C47.1 C48.1 C52.1 C53.1 C54.1 C55.1 C56.1 C57.1 C59.1 C60.1 C70.2 C71.2 C72.2 C93.2 C113.1 FB2.1 FB3.1 FB4.1 P2.5 R1.1 R1.2 R5.1 R6.2 R7.2 R8.1 R8.2 R11.1 R12.1 R14.1 R15.1 R19.1 R24.1 R27.1 R34.2 R36.2 R37.2 U1.2 U2.2 U3.0 U3.1 U3.3 U3.5 U3.6 U3.7 U3.12 U3.13 U3.14 U3.16 U3.18 U3.20 U3.21 U3.23 U4.0 U4.1 U4.3 U4.5 U4.6 U4.7 U4.12 U4.13 U4.14 U4.16 U4.18 U4.20 U4.21 U4.23 U5.23 U5.35 U5.47 U5.49 U6.2 U8.0 U8.2 U9.0 U9.2 U9.4 U9.6 U9.13 U9.14 U9.25 U9.31 U9.34 U9.39 U9.40 U10.2 U11.0 U11.1 U11.4 U11.6 U11.7 U11.8 U11.9 U11.10 U11.11 U11.12 U11.13 U11.15 U11.19 U11.20 U11.21 U11.22 U11.23 U11.24 USB2.5 X1.2 X1.4 X2.2 Y1.1 Y1.3 Y1.5 Y1.7 Y2.3 Y2.4 Y3.3 Y3.4 Y4.1 Y4.3 Y4.5 Y4.7 Y5.3 Y5.4 Y6.3 Y6.4 | length 14
  Top Layer w0.254: v1@3.073,32.69 3.241,32.857 cw(c3.969,32.13) U3.23 ; U3.3 5.719,31.517 ccw(c7.006,31.517) 6.096,30.607 6.283,30.42 ccw(c6.629,30.767) 6.629,30.277 ; U3.16 5.719,37.063 cw(c7.006,37.063) 6.096,37.973 ; v1@21.463,34.671 ccw(c20.553,35.581) 21.84,35.581 U4.16 ; 21.463,41.656 cw(c20.553,40.746) 21.84,40.746 U4.3 ; v2(22.34,39.092) U4.23
  Bottom Layer w0.254: R11.1 ccw(c17.272,3.774) 17.432,3.614 v1(17.882,4.064) ; C6.1 R24.1
  other v1: 10.058,0.66 10.693,0.914 11.506,1.27 9.246,1.397 10.084,1.727 8.204,1.956 9.169,2.489 7.036,2.616 15.367,2.819 8.357,3.023 6.096,3.251 13.64,3.327 7.417,3.378 6.629,3.785 4.851,4.039 13.716,4.064 7.137,4.521 14.376,4.547 3.759,4.623 6.147,4.826 2.794,5.004 4.953,5.004 16.332,5.283 17.704,5.563 5.613,5.613 19.736,5.639 6.477,5.664 18.771,5.69 16.205,5.944 2.413,5.994 9.93,5.993 10.68,5.993 11.43,5.993 12.18,5.993 12.93,5.993 5.334,6.248 4.699,6.375 9.93,6.743 10.68,6.743 11.43,6.743 12.18,6.743 12.93,6.743 16.18,6.782 15.545,7.087 2.591,7.29 5.994,7.442 4.826,7.468 9.93,7.493 10.68,7.493 11.43,7.493 12.18,7.493 12.93,7.493 16.002,7.595 21.971,7.747 22.733,7.772 17.602,7.976 1.448,8.179 2.261,8.204 9.93,8.243 10.68,8.243 11.43,8.243 12.18,8.243 12.93,8.243 17.45,8.687 9.93,8.993 10.68,8.993 11.43,8.993 12.18,8.993 12.93,8.993 25.705,9.093 24.282,9.144 1.346,9.246 16.612,9.347 18.085,9.373 6.147,9.525 19.025,9.576 16.332,10.211 1.118,10.465 6.096,10.49 16.002,10.744 15.367,11.049 1.168,11.455 6.121,11.481 8.611,11.684 14.986,12.09 6.045,12.167 8.458,12.319 9.677,12.37 11.735,12.421 1.321,12.624 14.351,12.7 6.147,12.827 8.509,12.954 10.135,12.954 12.116,13.081 13.665,13.157 12.852,13.31 22.581,13.487 1.219,13.538 21.26,13.64 18.085,14.199 21.387,14.503 1.118,14.859 6.121,15.189 7.061,15.215 1.194,16.18 6.071,16.307 6.731,16.84 1.016,16.942 1.803,17.17 6.172,17.475 7.518,17.704 0.762,17.78 2.794,17.78 6.528,18.085 7.137,18.618 0.762,18.796 1.778,18.796 2.794,18.796 3.81,18.796 4.826,18.796 5.842,18.796 7.239,19.533 6.274,19.558 0.762,19.812 2.794,19.812 17.653,20.193 6.629,20.269 1.803,20.295 11.176,20.32 24.282,20.447 7.518,21.006 3.124,21.311 2.261,21.463 18.872,22.073 5.715,22.555 2.159,22.809 1.321,22.987 20.345,23.571 19.177,23.597 11.176,23.622 5.156,23.647 17.958,23.749 24.333,23.774 1.092,23.927 22.479,24.028 9.398,24.384 21.539,24.663 4.115,24.968 0.61,25.324 4.978,25.375 0.508,26.416 3.556,26.416 17.526,26.67 5.512,26.873 2.388,26.924 1.6,26.949 21.133,27.127 10.897,27.28 21.793,27.33 0.508,27.432 3.556,27.432 17.018,27.432 27.94,27.432 4.724,27.534 25.832,27.635 28.448,27.94 23.216,28.016 26.162,28.194 3.607,28.346 24.13,28.448 33.274,28.702 11.227,28.905 6.401,28.931 5.41,29.185 12.497,29.235 24.409,29.337 17.018,29.464 0.914,29.54 2.946,29.616 19.228,29.769 20.396,29.769 21.285,29.845 13.462,29.947 14.376,29.947 16.51,29.972 17.526,29.972 4.521,30.15 9.804,30.226 24.613,30.302 10.668,30.48 23.038,30.632 33.274,30.632 26.162,30.734 26.924,30.734 27.686,30.734 21.996,30.81 16.967,31.09 4.369,31.242 11.176,31.242 0.94,31.344 2.845,31.598 33.274,31.75 17.272,32.004 25.4,32.258 22.936,32.283 14.326,32.385 20.091,32.461 2.946,32.487 13.233,32.487 16.51,32.512 11.659,32.766 1.295,32.868 18.669,32.969 17.526,33.02 21.234,33.172 19.812,33.198 23.8,33.198 25.4,33.274 20.853,33.909 2.032,33.934 17.018,34.036 26.162,34.29 23.114,34.315 10.516,34.366 28.346,34.417 25.375,34.468 3.15,34.544 21.539,34.671 17.018,35.052 26.162,35.052 11.303,35.23 23.724,35.23 2.261,35.255 25.451,35.357 28.27,35.433 12.294,35.458 19.609,35.738 23.19,35.789 13.31,35.941 26.568,35.966 16.51,36.068 17.526,36.068 19.025,36.068 3.861,36.144 25.425,36.271 7.417,36.449 11.913,36.5 10.135,36.551 4.394,36.576 2.057,36.627 28.27,36.678 11.303,36.754 18.644,36.83 17.323,36.932 26.645,37.008 3.962,37.084 12.649,37.16 10.516,37.287 5.817,37.414 13.437,37.465 14.453,37.49 25.73,37.694 24.587,37.719 28.296,37.922 4.089,37.998 6.299,38.176 2.007,38.329 14.63,38.532 26.441,38.532 28.296,38.786 7.036,38.938 4.039,39.421 10.643,39.446 26.34,39.599 12.319,39.624 33.274,39.624 1.753,39.853 11.481,39.853 7.468,39.954 28.499,39.954 8.941,40.157 10.82,40.284 17.526,40.386 18.288,40.386 19.05,40.386 12.522,40.64 4.496,40.818 28.677,40.843 5.486,40.894 33.274,41.148 26.797,41.554 6.502,41.707 13.818,41.707 28.397,41.707 1.651,41.783 23.749,41.834 7.798,42.037 9.627,42.215 17.069,42.393 20.371,42.393 26.848,42.393 4.191,42.418 33.274,42.418 11.659,42.545 16.256,42.545 15.011,42.672 18.186,42.672 23.19,42.774 19.177,42.901 26.238,43.053 5.893,43.129 27.686,43.307 8.382,43.332 7.29,43.358 10.617,43.485 4.597,43.586 21.996,43.713 13.106,43.917 22.86,44.196 27.686,44.196 1.93,44.348 20.853,44.552 19.507,45.187 17.602,45.466 18.364,45.466 22.86,45.466 27.686,45.466 15.85,45.491 14.707,45.542 16.459,45.593 13.157,45.745 9.296,45.847 11.278,46.025 2.743,46.203 9.703,46.66 22.86,46.736 27.686,46.736 5.029,46.863 7.061,46.863
  other v2: 3.326,11.061 4.076,11.061 4.826,11.061 3.326,11.811 4.076,11.811 4.826,11.811 3.326,12.561 4.076,12.561 4.826,12.561 5.219,33.159 5.969,33.159 6.719,33.159 5.219,33.909 5.969,33.909 6.719,33.909 5.219,34.659 5.969,34.659 6.719,34.659 20.84,37.592 21.59,37.592 22.34,37.592 20.84,38.342 21.59,38.342 22.34,38.342 20.84,39.092 21.59,39.092
  other v3: 26.545,14.183 27.645,14.183 28.745,14.183 29.845,14.183 30.945,14.183 26.545,15.283 27.645,15.283 28.745,15.283 29.845,15.283 30.945,15.283 26.545,16.383 27.645,16.383 28.745,16.383 29.845,16.383 30.945,16.383 26.545,17.483 27.645,17.483 28.745,17.483 29.845,17.483 30.945,17.483 26.545,18.583 27.645,18.583 28.745,18.583 29.845,18.583 30.945,18.583
KEY1: C6.2 R15.2 SW3.1 U5.39 | length 20.6
  Top Layer w0.152: U5.39 32.941,14.633 v1(33.198,14.376)
  Bottom Layer w0.152: SW3.1 17.639,16.115 17.639,15.672 ; R15.2@17.639,15.279 17.639,15.672 ; v1(33.198,14.376) 32.41,14.376 31.039,13.005 20.306,13.005 17.639,15.672
KEY2: C33.1 R14.2 SW2.1 U5.40 | length 19.3
  Top Layer w0.152: U5.40 32.984,15.133 33.181,14.935 33.655,14.935 33.731,15.011 v1(33.833,15.011)
  Bottom Layer w0.152: SW2.1 23.981,22.465 C33.1 24.003,22.102 ; R14.2 24.003,22.102 ; v1(33.833,15.011) 33.833,16.844 32.842,17.834 32.842,20.371 31.111,22.102 24.003,22.102
KEY3: C70.1 R24.2 SW1.1 U5.41 | length 23
  Top Layer w0.152: U5.41 v1@33.16,15.633
  Bottom Layer w0.152: SW1.1 16.478,22.225 17.391,22.225 17.653,22.487 C70.1@17.653,22.073 ; R24.2 C70.1@17.653,22.073 ; v1@33.163,15.456 32.055,16.564 32.055,18.618 31.471,19.202 24.019,19.202 23.998,19.181 23.602,19.181 23.58,19.202 20.523,19.202 C70.1@17.653,22.073
  other v1: 33.325,15.469
KEY4: C71.1 R27.2 SW4.1 U5.42 | length 29.3
  Top Layer w0.152: v1(10.49,22.465) 13.296,19.66 v1(23.8,19.66) ; U5.42 v1@33.168,16.133
  Bottom Layer w0.152: SW4.1 v1(10.49,22.465) R27.2@11.063,22.465 ; v1(23.8,19.66) 31.521,19.66 32.537,18.644 32.537,16.764 v1(33.172,16.129)
  Bottom Layer w0.254: C71.1 R27.2
KEY5: C72.1 R19.2 SW5.1 U5.43 | length 27.9
  Top Layer w0.152: U5.43 32.195,16.612 33.631,16.612 33.807,16.788 v1(33.807,18.009)
  Bottom Layer w0.152: C72.1 18.517,27.195 18.517,26.694 18.651,26.56 19.642,26.56 20.117,26.086 22.784,26.086 24.028,27.33 25.4,27.33 26.645,26.086 27.711,26.086 33.807,19.99 v1(33.807,18.009)
  Bottom Layer w0.254: SW5.1 17.639,28.815 R19.2 C72.1
LED: LED3.1 U5.45 | length 48.4
  Top Layer w0.152: v1(17.704,46.38) 17.932,46.609 LED3.1 ; U5.45 32.746,17.633 34.061,18.948 v1(34.061,21.59) ; v1(34.087,24.917) 34.95,25.781 v1(34.95,46.05)
  Bottom Layer w0.152: v1(17.704,46.38) 18.034,46.05 v1(34.95,46.05) ; v1(34.061,21.59) 34.061,24.892 v1(34.087,24.917)
NetAnt2_1: Ant2.1 R1.3 | length 1.8
  Top Layer w0.305: R1.3 25.254,44.124 cw(c25.455,44.124) Ant2.1@25.313,44.266
NetC2_2: C2.2 R3.1 U1.1 U1.3 | length 6.3
  Top Layer w0.381: U1.1 U1.1@22.806,6.797 ; U1.3 23.089,8.712 23.368,8.433 23.368,7.359 U1.1@22.806,6.797 ; R3.1 24.472,7.124 C2.2 24.145,6.797 U1.1@22.806,6.797
NetC3_2: C3.2 U5.22 | length 1.4
  Top Layer w0.152: C3.2@23.929,14.633 U5.22
NetC4_2: C4.2 C73.2 R4.1 U5.9 | length 4
  Top Layer w0.254: R4.1 C73.2 C4.2 26.645,20.599 27.203,20.599 27.495,20.308 U5.9
NetC5_1: C5.1 R7.1 R8.3 | length 4.3
  Top Layer w0.305: R8.3 27.451,33.908 ccw(c27.82,33.908) C5.1
NetC5_2: C5.2 U8.1 | length 0.9
  Top Layer w0.254: U8.1 C5.2@27.547,32.627
NetC7_2: C7.2 C47.2 C48.2 FB10.2 L7.1 | length 4.6
  Top Layer w0.305: L7.1 C48.2 ccw(c6.424,21.643) 6.858,21.643 FB10.2
NetC8_2: C8.2 U9.10 | length 0.9
  Top Layer w0.254: U9.10 14.869,9.743 15.159,10.033 C8.2
NetC9_1: C9.1 FB1.2 U9.21 | length 2
  Top Layer w0.254: FB1.2 7.087,10.835 7.626,10.296 C9.1 ; C9.1@7.641,9.906 ccw(c7.804,9.906) 7.804,9.743 U9.21
NetC10_2: C10.2 U9.36 | length 0.8
  Top Layer w0.254: U9.36 11.68,3.916 ccw(c11.836,3.916) C10.2@11.836,3.759
NetC11_2: C11.2 U9.38 | length 0.9
  Top Layer w0.152: U9.38 12.68,4.424 12.826,4.278 12.826,4.148 12.96,4.014 13.001,4.014 13.001,3.925 13.06,3.866 C11.2
NetC14_2: C14.2 R2.1 U2.1 U2.3 | length 8.2
  Top Layer w0.508: U2.3 20.493,24.536 21.011,24.019 21.011,23.123 U2.1@20.595,22.708 ; U2.1@20.081,22.708 U2.1@20.595,22.708 ; U2.1@20.508,22.621 U2.1@20.595,22.708 ; R2.1 23.509,23.382 22.835,22.708 C14.2 U2.1@20.595,22.708
NetC15_2: C15.2 U9.29 | length 0.9
  Top Layer w0.254: C15.2 ccw(c7.668,5.817) 7.668,5.743 U9.29
NetC17_2: C17.2 U9.3 | length 0.9
  Top Layer w0.254: U9.3 14.966,6.243 C17.2
NetC19_2: C19.2 U9.27 | length 0.9
  Top Layer w0.254: C19.2 cw(c7.78,6.604) 7.78,6.743 U9.27
NetC21_2: C21.2 U9.33 | length 1
  Top Layer w0.254: C21.2 ccw(c9.931,3.932) 10.18,3.932 U9.33
NetC23_1: C23.1 FB5.2 FB6.2 U9.12 | length 14.3
  Top Layer w0.254: v1(11.125,2.235) FB5.2 ; FB6.2 FB6.2@13.18,11.938 ; U9.12 FB6.2@13.18,11.938 ; v1(13.589,11.938) FB6.2@13.18,11.938
  Bottom Layer w0.254: v1(11.125,2.235) 11.125,3.404 12.319,4.597 13.614,4.597 14.199,5.182 14.199,10.185 13.589,10.795 v1(13.589,11.938)
NetC24_1: C24.1 FB5.1 U9.35 | length 1.3
  Top Layer w0.254: FB5.1@11.172,3.242 C24.1 ; C24.1@11.18,3.81 U9.35
NetC25_1: C25.1 FB6.1 | length 0.6
  Top Layer w0.254: FB6.1 C25.1
NetC26_2: C26.2 C27.2 FB7.2 U8.7 | length 3.4
  Top Layer w0.254: FB7.2 27.047,27.25 U8.7
NetC28_1: C28.1 R35.2 | length 1.1
  Top Layer w0.305: R35.2 C28.1@27.424,40.64
NetC28_2: C28.2 R8.4 | length 0.9
  Top Layer w0.254: C28.2 27.432,38.8 ccw(c27.497,38.8) R8.4
NetC29_1: C29.1 U8.8 | length 1.1
  Top Layer w0.152: U8.8 27.547,29.341 C29.1
NetC30_2: C30.2 U8.3 | length 0.9
  Top Layer w0.254: U8.3 C30.2@26.547,32.635
NetC31_2: C31.2 U9.8 | length 0.8
  Top Layer w0.254: U9.8 C31.2@15.199,8.743
NetC32_1: C32.1 U11.14 | length 1.2
  Top Layer w0.305: U11.14 C32.1
NetC34_1: C34.1 U3.19 | length 6.3
  Top Layer w0.305: C34.1 3.048,35.913 ccw(c3.684,35.913) 3.234,35.463 ccw(c3.969,36.198) U3.19
NetC34_2: C34.2 C35.2 C36.1 L4.1 | length 4
  Top Layer w0.254: C36.1 L4.1
  Top Layer w0.305: C34.2 3.048,42.628 cw(c5.588,42.628) 3.792,44.424 C36.1
NetC36_2: C36.2 C37.2 C38.1 L4.2 L6.1 | length 3.9
  Top Layer w0.305: L4.2 C36.2 C37.2 C38.1 L6.1
NetC38_2: C38.2 C39.2 C40.1 L6.2 | length 2.7
  Top Layer w0.305: L6.2 C38.2 C39.2 C40.1
NetC41_2: C41.2 C113.2 FB8.1 U4.8 | length 2.7
  Top Layer w0.254: FB8.1@16.859,39.092 U4.8
NetC42_1: C42.1 U3.17 | length 2.2
  Top Layer w0.254: C42.1 cw(c5.178,38.079) 5.219,38.079 U3.17
NetC42_2: C42.2 Y1.4 | length 12.2
  Top Layer w0.305: C42.2 6.622,40.531 cw(c8.418,38.735) 8.418,41.275 10.886,41.275 ccw(c10.886,43.815) 12.682,42.019 14.098,43.435 cw(c15.629,41.903) 15.629,44.069
NetC45_1: C45.1 C46.1 FB11.1 U3.8 | length 2.7
  Top Layer w0.254: U3.8 9.596,33.159 9.728,33.291 FB11.1
NetC49_1: C49.1 Y1.8 | length 4.7
  Top Layer w0.305: Y1.8 18.129,44.069 ; 18.406,44.069 18.129,44.069 ; C49.1 cw(c21.848,43.652) 21.102,42.906 20.683,43.325 ccw(c18.887,41.529) 18.887,44.069 18.129,44.069
NetC50_1: C50.1 L7.2 U10.3 | length 2.8
  Top Layer w0.305: C50.1 4.635,21.827 cw(c4.144,21.336) L7.2 U10.3
NetC50_2: C50.2 Y5.1 | length 2.2
  Top Layer w0.305: Y5.1 ccw(c3.301,25.324) 2.404,24.427 C50.2
NetC51_1: C51.1 U3.15 | length 3.2
  Top Layer w0.254: U3.15 6.219,36.229 cw(c7.967,36.229) 6.731,37.465 cw(c7.344,36.852) 7.344,37.719 C51.1
NetC51_2: C51.2 Y4.4 | length 1.6
  Top Layer w0.305: C51.2 9.229,37.804 cw(c10.557,36.476) Y4.4
NetC52_2: C52.2 U5.5 X1.1 | length 3
  Top Layer w0.152: U5.5 29.495,20.757 X1.1@30.136,21.399 ; X1.1@30.601,22.352 C52.2
NetC53_2: C53.2 U5.6 X1.3 | length 5.3
  Top Layer w0.152: X1.3@28.423,23.647 29.261,22.809 29.261,21.081 28.995,20.815 U5.6 ; X1.3@28.829,24.511 C53.2
NetC57_2: C57.2 U9.9 | length 0.9
  Top Layer w0.254: U9.9 15.064,9.243 C57.2
NetC58_1: C58.1 Y4.8 | length 1.2
  Top Layer w0.305: Y4.8 ccw(c12.557,39.006) 13.018,38.545 C58.1
NetC59_2: C59.2 C60.2 FB9.1 U11.2 U11.3 | length 4.1
  Top Layer w0.254: U11.2 3.326,9.247 C59.2 ; FB9.1@3.826,6.917 U11.3
NetC61_1: C61.1 U3.24 | length 13.1
  Top Layer w0.305: U3.24 ccw(c4.966,31.662) 3.556,31.662 3.556,30.77 ccw(c6.096,30.77) 4.3,28.974 4.336,28.938 ccw(c6.132,30.734) 6.132,28.194 C61.1
NetC61_2: C61.2 Y3.1 | length 1.2
  Top Layer w0.305: C61.2 Y3.1
NetC62_1: C62.1 U4.22 | length 1.7
  Top Layer w0.305: U4.22 24.937,38.592 ccw(c24.937,39.067) C62.1
NetC62_2: C62.2 R1.4 R35.1 | length 1.9
  Top Layer w0.305: R1.4 25.254,39.785 ccw(c25.319,39.785) C62.2
NetC63_1: C63.1 Y5.2 | length 1.6
  Top Layer w0.305: Y5.2 C63.1
NetC63_2: C63.2 U3.22 | length 3.8
  Top Layer w0.305: C63.2 2.032,31.853 cw(c4.113,31.853) 2.642,33.325 cw(c3.448,32.518) 3.448,33.659 U3.22
NetC64_1: C64.1 R20.2 U9.23 | length 2.3
  Top Layer w0.305: C64.1@6.215,8.509 cw(c6.449,8.509) 6.449,8.743 U9.23
  other v1: 6.452,8.56
NetC64_2: C64.2 U11.5 | length 1.5
  Top Layer w0.305: U11.5 4.826,8.89 ccw(c5.207,8.89) C64.2@5.207,8.509
NetC65_1: C65.1 U3.2 | length 10.3
  Top Layer w0.305: U3.2 5.219,31.142 ccw(c6.54,31.142) 5.606,30.208 ccw(c7.402,32.004) 7.402,29.464 10.259,29.464 ccw(c10.259,32.004) 12.055,30.208 C65.1
NetC65_2: C65.2 Y6.1 | length 1.2
  Top Layer w0.305: C65.2 Y6.1
NetC66_1: C66.1 Y6.2 | length 1.3
  Top Layer w0.305: Y6.2 C66.1
NetC67_1: C67.1 U3.4 | length 9.9
  Top Layer w0.305: U3.4 6.219,31.488 ccw(c6.776,31.488) 6.382,31.094 ccw(c6.944,31.655) 6.944,30.861 8.934,30.861 ccw(c8.934,32.595) 10.16,31.369 ccw(c8.627,32.902) 10.795,32.902 cw(c12.306,32.902) 11.238,33.971 cw(c12.622,32.586) 12.622,34.544 C67.1
NetC67_2: C67.2 Y2.1 | length 1.2
  Top Layer w0.305: C67.2 Y2.1
NetC68_1: C68.1 Y2.2 | length 1.5
  Top Layer w0.254: Y2.2 cw(c18.684,34.478) 18.684,34.571 C68.1
NetC69_1: C69.1 Y3.2 | length 1.3
  Top Layer w0.305: Y3.2 C69.1
NetFB2_2: FB2.2 U9.19 | length 0.8
  Top Layer w0.254: FB2.2 cw(c9.652,11.254) 9.68,11.254 U9.19
NetFB3_2: FB3.2 U9.18 | length 0.8
  Top Layer w0.254: FB3.2 cw(c10.16,11.262) 10.18,11.262 U9.18
NetFB4_2: FB4.2 U9.22 | length 1.3
  Top Layer w0.254: FB4.2@7.188,9.423 7.369,9.243 U9.22
NetLED3_2: LED3.2 R6.1 | length 1
  Top Layer w0.152: R6.1@20.422,45.56 LED3.2
NetP4_3: P4.3 R9.1 R11.2 | length 2.3
  Bottom Layer w0.508: P4.3@16.256,1.27 R9.1 R11.2@17.264,2.548
NetP4_4: P4.4 R10.1 R12.2 | length 3.7
  Bottom Layer w0.508: R12.2@12.073,2.548 R10.1 ; P4.4 13.589,2.523
NetR13_1: R13.1 SW4.2 | length 1.4
  Bottom Layer w0.254: R13.1 SW4.2@7.616,27.043
NetR16_1: R16.1 SW2.2 | length 1.3
  Bottom Layer w0.254: R16.1 SW2.2@20.316,27.043
NetR17_1: R17.1 SW1.2 | length 1.4
  Bottom Layer w0.254: R17.1 SW1.2@13.966,27.043
NetR18_2: R18.2 U9.1 | length 1.2
  Top Layer w0.152: U9.1 R18.2@15.585,5.243
NetR21_1: R21.1 SW3.2 | length 1.4
  Bottom Layer w0.254: R21.1 SW3.2@13.966,20.693
NetR23_1: R23.1 SW5.2 | length 1.5
  Bottom Layer w0.254: R23.1 SW5.2@13.966,33.393
NetR34_1: R34.1 X2.1 | length 1.7
  Top Layer w0.152: R34.1 28.664,4.856 X2.1
NetR36_1: R36.1 U8.6 | length 1.8
  Top Layer w0.152: R36.1 25.773,29.21 26.416,29.21 26.547,29.341 U8.6
NetR37_1: R37.1 U5.44 | length 1.1
  Top Layer w0.152: U5.44 R37.1@33.27,17.133
NetR38_2: R38.2 U5.7 | length 1.6
  Top Layer w0.152: U5.7 v1(28.495,20.723)
  Bottom Layer w0.152: v1(28.495,20.723) 28.829,20.389 R38.2
NetU3_9: U3.9 U5.18 | length 34.4
  Top Layer w0.152: U3.9 8.742,33.659 v1(8.865,33.782) ; v1@13.669,14.728 13.72,14.728 15.625,16.633 U5.18
  Bottom Layer w0.152: v1(8.865,33.782) 8.915,33.731 8.915,20.692 9.862,19.745 12.903,16.704 12.903,15.316 13.409,14.81 v1(13.587,14.81)
NetU3_10: U3.10 U5.19 | length 36.3
  Top Layer w0.152: U3.10 8.505,34.159 v1(8.788,34.442) ; v1(14.048,14.349) 15.832,16.133 U5.19
  Bottom Layer w0.152: v1(8.788,34.442) 8.788,34.261 8.666,34.261 8.386,33.98 8.386,33.584 8.611,33.359 8.611,20.074 12.251,16.434 12.251,15.046 12.965,14.332 14.031,14.332 v1(14.048,14.349)
NetU3_11: U3.11 U5.20 | length 37.6
  Top Layer w0.152: 8.319,34.659 v1(8.763,35.103) ; v1@14.427,13.97 14.427,14.021 16.039,15.633 U5.20
  Bottom Layer w0.152: v1(8.763,35.103) 8.458,34.798 8.458,34.789 8.31,34.641 8.31,34.335 8.081,34.106 8.081,33.458 8.306,33.233 8.306,19.456 9.322,18.44 11.598,16.164 11.598,15.977 11.604,15.972 11.604,14.77 12.504,13.87 14.492,13.87 v1(14.51,13.888)
NetU4_9: U4.9 U5.27 | length 42.7
  Top Layer w0.152: v1(14.732,35.839) 14.732,35.941 14.393,36.28 14.393,36.711 16.24,38.557 19.59,38.557 U4.9 ; v1(15.748,13.919) 18.288,11.379 26.213,11.379 26.995,12.161 U5.27
  Bottom Layer w0.152: v1(14.732,35.839) 15.05,35.522 15.05,14.617 v1(15.748,13.919)
NetU4_10: U4.10 U5.26 | length 40.3
  Top Layer w0.152: v1(14.872,36.512) 16.451,38.092 U4.10 ; v1(16.764,13.767) 18.745,11.786 26.06,11.786 26.495,12.22 U5.26
  Bottom Layer w0.152: v1(14.872,36.512) 15.355,36.03 15.355,15.176 v1(16.764,13.767)
NetU4_11: U4.11 U5.25 | length 38.1
  Top Layer w0.152: v1(15.723,36.474) 15.723,36.855 16.459,37.592 U4.11 ; v1(16.205,15.011) 19.05,12.167 25.832,12.167 25.995,12.33 U5.25
  Bottom Layer w0.152: v1(15.723,36.474) 15.659,36.411 15.659,15.304 15.952,15.011 v1(16.205,15.011)
NetU5_11: U5.11 U8.4 U8.5 | length 14.9
  Top Layer w0.152: v1(24.562,26.721) 24.909,27.068 24.909,29.228 25.488,29.807 ; v1(25.197,22.911) 25.197,21.006 25.578,20.625 26.086,20.625 U5.11@26.495,20.216
  Top Layer w0.254: U8.5 25.562,29.734 25.489,29.807 25.222,30.074 25.222,31.344 25.607,31.729 25.619,31.729 25.625,31.734 U8.4
  Bottom Layer w0.152: v1(24.562,26.721) 25.984,25.298 25.984,23.698 v1(25.197,22.911)
NetU5_13: U5.13 U11.16 | length 24.4
  Top Layer w0.152: U11.16 v1@3.826,14.614 ; v1(8.179,14.656) 8.763,14.656 13.24,19.133 U5.13
  Bottom Layer w0.152: v1(3.886,14.808) 3.886,14.757 3.785,14.656 v1(8.179,14.656)
NetU5_14: U5.14 U9.24 | length 25.6
  Top Layer w0.152: v1@7.659,8.243 U9.24 ; v1(7.874,10.871) 7.874,13.208 13.299,18.633 U5.14
  Bottom Layer w0.152: v1(7.595,8.179) 7.874,8.458 v1(7.874,10.871)
NetU5_15: U5.15 U9.16 U11.17 | length 30.2
  Top Layer w0.152: U11.17 3.326,14.438 v1@3.326,15.775 ; v1(11.125,15.773) 13.485,18.133 U5.15 ; U9.16 v1@11.18,13.001
  Bottom Layer w0.152: v1(3.302,15.799) 3.327,15.773 v1(11.125,15.773) 11.159,15.74 11.159,13.022 v1(11.176,13.005)
NetU5_16: U5.16 U9.20 | length 20.5
  Top Layer w0.152: U9.20 9.18,12.987 13.826,17.633 U5.16
NetU5_17: U5.17 U9.17 U11.18 | length 28.7
  Top Layer w0.152: v1(2.388,14.427) U11.18@2.826,13.989 ; U9.17 v1(10.68,13.753) ; v1@10.68,13.868 v1(10.68,13.753) ; U5.17 13.78,17.133 10.68,14.033 v1(10.68,13.753)
  Bottom Layer w0.152: v1(2.388,14.427) 3.061,13.753 v1(10.68,13.753)
NetU9_5: U9.5
NetU9_30: U9.30
NetU9_32: U9.32
PA9: P4.1 R25.1 U5.30 | length 17.6
  Top Layer w0.152: v1(21.133,3.581) 21.133,9.627 22.403,10.897 27.178,10.897 28.495,12.214 U5.30
  Bottom Layer w0.152: v1(21.133,3.581) 21.539,3.581 21.785,3.335 R25.1 21.785,1.719
PA10: P4.2 R26.1 U5.31 | length 20.5
  Top Layer w0.152: v1(21.615,4.064) 21.438,4.242 21.438,9.5 22.478,10.541 27.584,10.541 28.995,11.952 U5.31
  Bottom Layer w0.152: P4.2@18.499,1.313 R26.1 18.499,3.386 19.177,4.064 v1(21.615,4.064)
PA11: U5.32 USB2.2 | length 38.2
  Top Layer w0.254: v1(29.286,11.455) 29.495,11.664 U5.32 ; USB2.2 30.482,40.361 v1(31.775,40.361)
  Bottom Layer w0.152: v1(29.286,11.455) 29.921,10.82 32.461,10.82 35.001,13.36 35.001,27.712 31.775,30.938 v1(31.775,40.361)
PA12: U5.33 USB2.3 | length 39.8
  Top Layer w0.254: U5.33 29.997,12.931 v1(29.997,10.338) ; USB2.3 v1(31.775,41.021)
  Bottom Layer w0.152: v1(29.997,10.338) 32.41,10.338 35.306,13.234 35.306,27.838 32.08,31.064 32.08,39.989 32.254,40.162 32.254,40.559 31.792,41.021 v1(31.775,41.021)
PA13: P2.3 U5.34 | length 25.6
  Top Layer w0.254: P2.3 v1(31.674,30.353) ; U5.34 30.495,11.796 v1(30.607,11.684)
  Bottom Layer w0.152: v1(30.607,11.684) 30.81,11.481 32.461,11.481 34.696,13.716 34.696,19.963 31.979,22.681 31.979,29.321 32.152,29.494 32.152,29.891 31.69,30.353 v1(31.674,30.353)
PA14: P2.2 U5.37 | length 20
  Top Layer w0.152: U5.37 v1(33.039,13.633)
  Top Layer w0.254: P2.2 30.482,29.693 v1(31.674,29.693)
  Bottom Layer w0.152: v1(31.674,29.693) 31.674,22.554 34.392,19.837 34.392,14.681 33.343,13.633 v1(33.039,13.633)
VCCSW: C13.2 FB7.1 FB8.2 FB9.2 FB11.2 U2.5 | length 1.5
  Top Layer w0.508: v1@10.236,35.052 v1(10.262,35.077) ; C13.2 15.987,22.621 U2.5
  other v1: 3.505,5.639 4.115,5.639 17.043,23.038 16.281,23.393 25.578,26.391 15.494,38.76 15.494,39.395
VccSYN: C1.2 C12.1 C16.1 C18.1 C20.1 C22.1 C93.1 FB1.1 R18.1 R20.1 U1.5 U9.7 U9.11 U9.15 U9.26 U9.37 X2.4 | length 11.7
  Top Layer w0.152: C12.1@12.476,3.78 12.344,3.912 12.344,4.108 12.21,4.242 12.18,4.242 U9.37 12.326,4.347 12.326,4.148 12.46,4.014 12.522,4.014 12.518,4.01 v1(12.518,3.78)
  Top Layer w0.254: FB1.1 v1(7.087,12.446) ; C18.1@7.518,7.243 7.874,7.243 ; v1(7.772,7.518) 7.772,7.345 7.874,7.243 ; U9.26 7.874,7.243 ; U9.15 C22.1@11.68,11.282 ; C22.1 11.688,11.278 v1(12.09,11.278) ; U9.11 13.68,10.526 cw(c14.33,10.526) C16.1 v1(14.33,11.663) ; U9.7 14.494,8.179 v1(14.986,8.179) 15.041,8.179 C20.1 ; v1(15.088,4.216) 15.105,4.199 R18.1
  Top Layer w0.508: C1.2@18.247,6.797 U1.5 ; C93.1 28.664,1.621 X2.4
  Bottom Layer w0.254: R20.1@6.739,7.518 v1(7.772,7.518) ; v1(12.09,11.278) v1@12.116,11.278
  other v1: 28.605,1.448 17.831,6.426 18.872,6.807
pads on no net: P2.4 SW1.3 SW1.4 SW2.3 SW2.4 SW3.3 SW3.4 SW4.3 SW4.4 SW5.3 SW5.4 U1.4 U2.4 U5.2 U5.3 U5.4 U5.10 U5.12 U5.21 U5.28 U5.29 U5.38 U5.46 U6.4 U9.28 USB2.4

## Polygon pours and split planes (outlines as drawn)
GND on Top Layer "Top Layer-GND" (solid, remove dead copper, pour order 2): -2.413,48.895 38.481,48.895 38.862,49.276 38.989,49.149 38.989,-2.032 -6.223,-2.032 -6.604,-1.651
GND on Internal Plane 1 (split plane): 35.162,47.086 35.23,47.065 35.293,47.032 35.348,46.986 35.393,46.931 35.427,46.868 35.447,46.8 35.454,46.737 35.453,46.729 35.453,0.812 35.454,0.803 35.447,0.741 35.427,0.673 35.393,0.61 35.348,0.555 35.293,0.509 35.23,0.476 35.162,0.455 35.099,0.449 35.091,0.45 0.857,0.45 0.849,0.449 0.786,0.455 0.718,0.476 0.655,0.509 0.6,0.555 0.555,0.61 0.521,0.673 0.501,0.741 0.494,0.803 0.495,0.812 0.495,46.729 0.494,46.737 0.501,46.8 0.521,46.868 0.555,46.931 0.6,46.986 0.655,47.032 0.718,47.065 0.786,47.086 0.849,47.092 0.857,47.091 23.851,47.091 23.851,43.409 26.746,43.409 26.746,47.091 35.091,47.091 35.099,47.092
3.3D on Internal Plane 2 (split plane): 35.453,6.81 20.373,6.81 20.373,25.271 35.453,25.271
VccSYN on Internal Plane 2 (split plane): 20.114,6.68 20.124,6.631 20.152,6.589 20.194,6.561 20.244,6.551 35.453,6.551 35.453,0.812 35.454,0.803 35.447,0.741 35.427,0.673 35.393,0.61 35.348,0.555 35.293,0.509 35.23,0.476 35.162,0.455 35.099,0.449 35.091,0.45 6.708,0.45 6.708,13.46 20.114,13.46
VCCSW on Internal Plane 2 (split plane): 35.162,47.086 35.23,47.065 35.293,47.032 35.348,46.986 35.393,46.931 35.427,46.868 35.447,46.8 35.454,46.737 35.453,46.729 35.453,25.529 20.244,25.529 20.194,25.52 20.152,25.492 20.124,25.45 20.114,25.4 20.114,13.718 6.579,13.718 6.529,13.709 6.487,13.681 6.459,13.639 6.449,13.589 6.449,0.45 0.857,0.45 0.849,0.449 0.786,0.455 0.718,0.476 0.655,0.509 0.6,0.555 0.555,0.61 0.521,0.673 0.501,0.741 0.494,0.803 0.495,0.812 0.495,46.729 0.494,46.737 0.501,46.8 0.521,46.868 0.555,46.931 0.6,46.986 0.655,47.032 0.718,47.065 0.786,47.086 0.849,47.092 0.857,47.091 35.091,47.091 35.099,47.092

## Keep-outs
Keep-Out Layer:
  lines w0.254: 36.091,46.729 ccw(c35.091,46.729) 35.091,47.729 0.857,47.729 ccw(c0.857,46.729) -0.143,46.729 -0.143,0.812 ccw(c0.857,0.812) 0.857,-0.188 35.091,-0.188 ccw(c35.091,0.812) 36.091,0.812 36.091,46.812

## Other copper
Internal Plane 1 (plane layer: these items are gaps in the copper):
  region: 23.851,47.117 23.851,43.409 26.746,43.409 26.746,47.117
  region: 4.242,20.803 4.242,19.761 5.461,19.761 5.461,20.803
  region: 4.216,17.831 4.216,16.789 5.436,16.789 5.436,17.831
  rectangle: 14.91,33.934 15.951,35.154
  rectangle: 18.085,33.934 19.126,35.154
  rectangle: 14.884,30.759 15.926,31.979
  rectangle: 18.085,30.759 19.126,31.979
  rectangle: 14.884,27.559 15.926,28.778
  rectangle: 18.11,27.584 19.152,28.804
Internal Plane 2 (plane layer: these items are gaps in the copper):
  lines w0.254: 6.579,-0.061 6.579,13.589 20.244,13.589 ; 35.963,6.68 20.244,6.68 20.244,25.4 35.963,25.4

## Silkscreen, mask and mechanical layers (free items; w line width, h text height)
Top Overlay:
  lines w0.635: -20.549,24.867 -20.549,50.089 65.405,50.089 65.405,24.867 -20.549,24.867